# Altium PCB L-BAND_V2_0.pcbdoc
Units mil, origin at the board's own origin, x right, y up, seen from the top; angles counter-clockwise.
Board outline 805.03 x 1342.03 mil, 2 copper layers (Top Layer, Bottom Layer); 34 components, 38 nets, 153 pads, 78 vias.
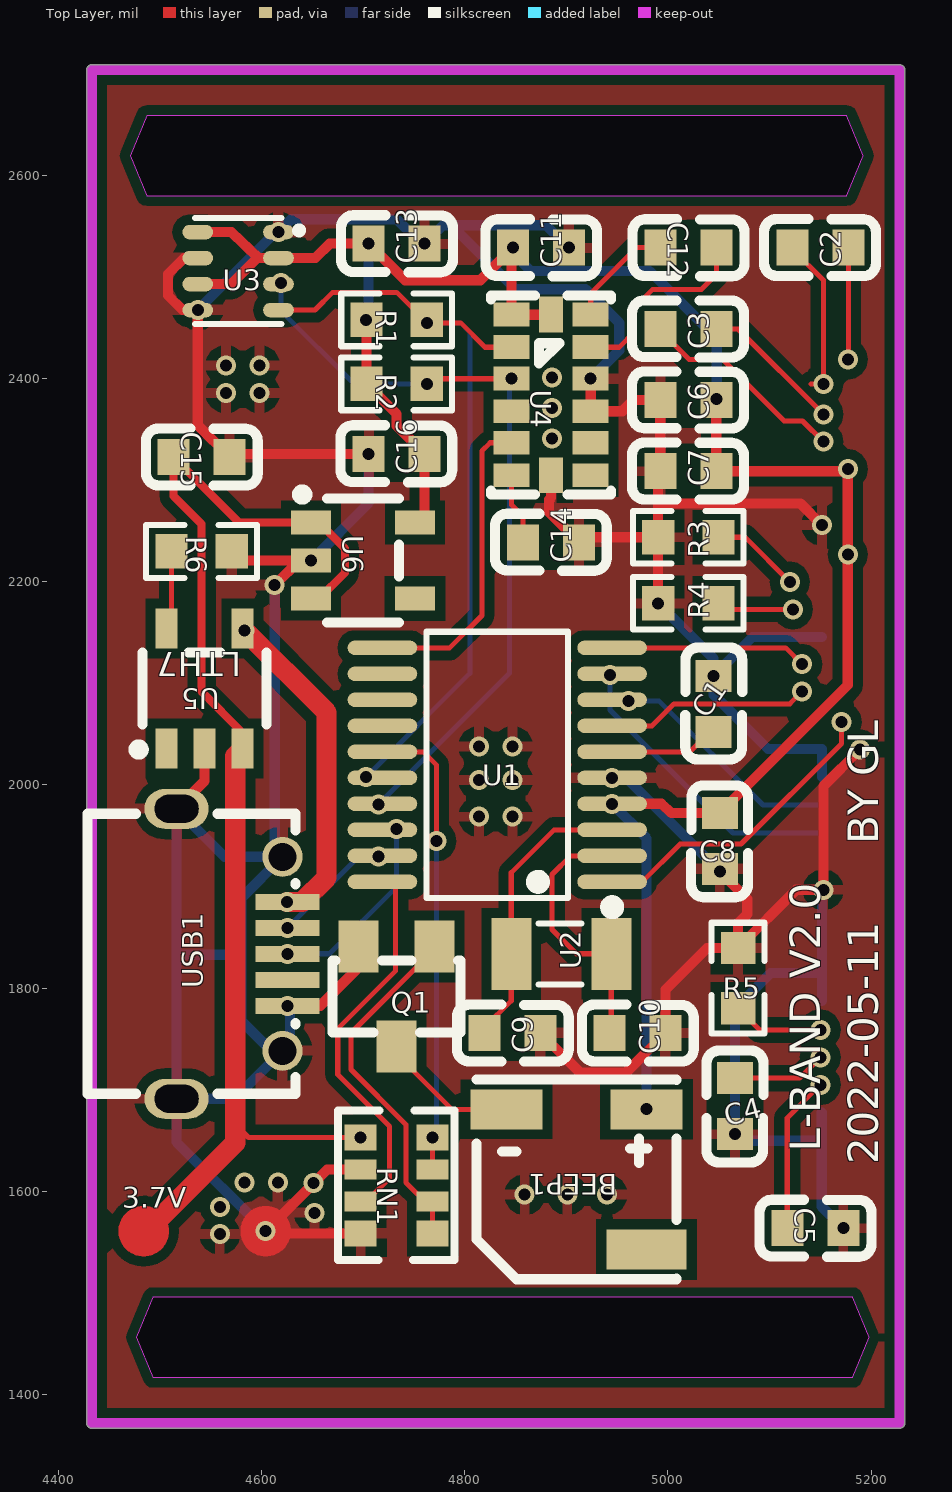
[diagram p0: Top Layer view]
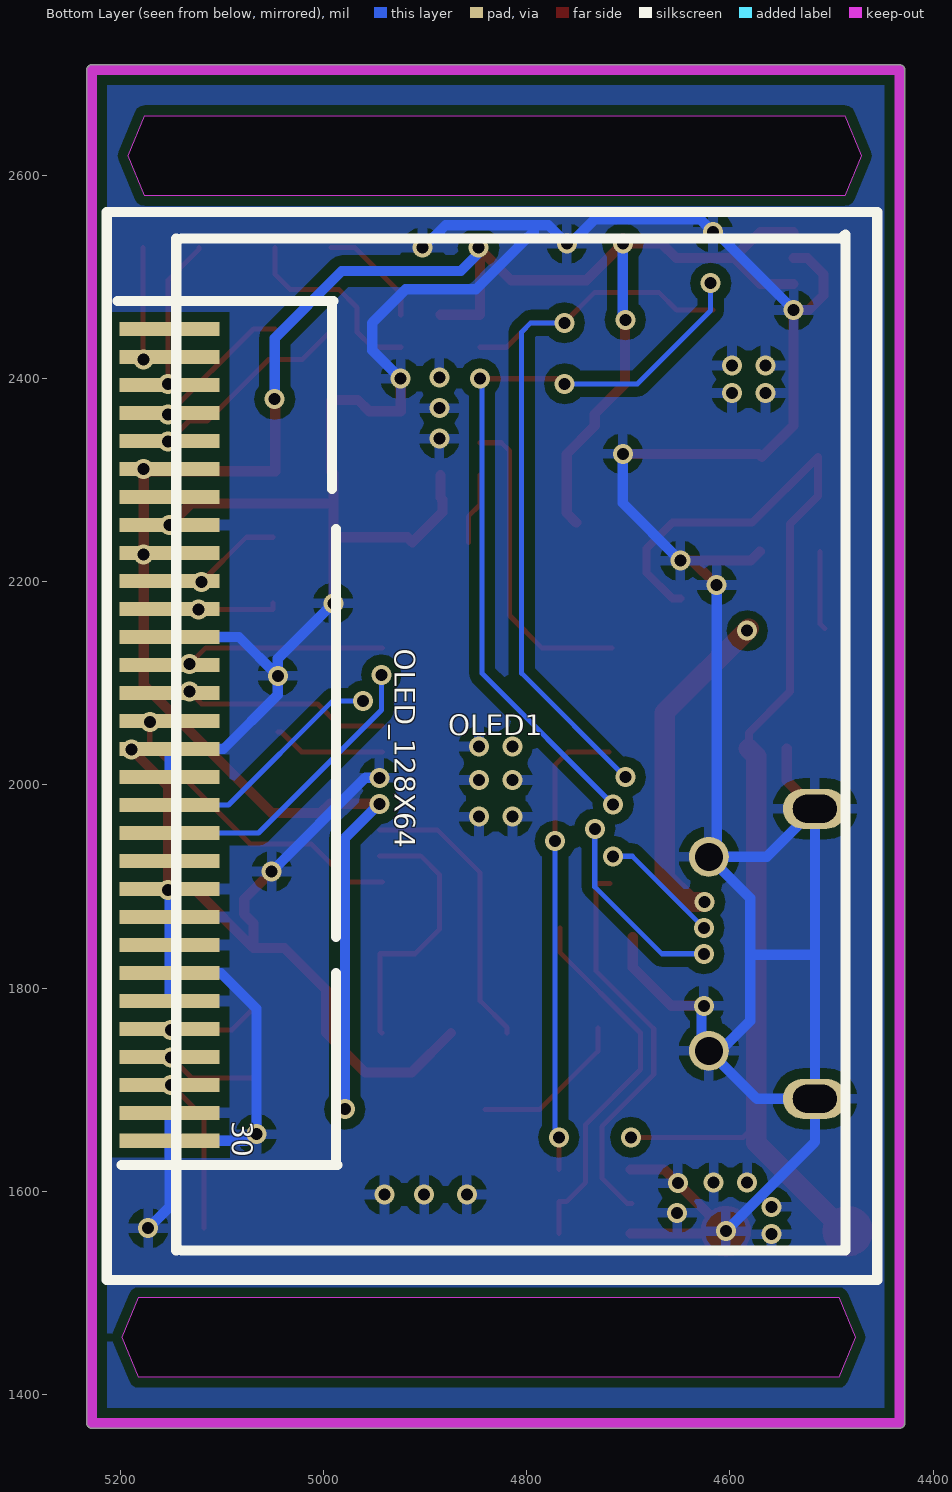
[diagram p1: Bottom Layer view, seen from below]

## Layer stack, top to bottom
Top Solder: solder mask 0.4, Solder Resist, Dk 3.5
Top Layer: signal copper 1.4
Dielectric1: dielectric 12.6, FR-4, Dk 4.8
Bottom Layer: signal copper 1.4
Bottom Solder: solder mask 0.4, Solder Resist, Dk 3.5

## Board outline
4427.95,1371.84 4427.95,1689.84 cw(c4432.97,1689.84) 4427.95,1689.94 4427.95,2697.84 ccw(c4432.97,2697.84) 4427.95,2697.74 4427.95,2697.84 4427.95,2703.84 cw(c4432.97,2703.84) 4432.97,2708.86 5227.97,2708.86 cw(c5227.97,2703.84) 5232.98,2703.84 5232.98,1371.84 cw(c5227.97,1371.84) 5227.97,1366.83 4432.97,1366.83 cw(c4432.97,1371.84)
cut-out: 4492.97,1416.84 5181.94,1416.84 5198.25,1456.21 5181.94,1495.58 4492.97,1495.58 4476.66,1456.21
cut-out: 4486.97,2580.1 5175.94,2580.1 5192.25,2619.47 5175.94,2658.84 4486.97,2658.84 4470.66,2619.47

## Design rules (kind name [scope] priority, off if disabled: settings)
Clearance [All] p1: gap=10
PolygonConnect [All] p1: connectstyle=Relief reliefconductorwidth=10 reliefentries=4 polygonreliefangle="90 Angle" airgapwidth=10
RoutingVias [All] p1: holewidth=28 width=50 viastyle="Through Hole" minholewidth=28 minwidth=50 maxholewidth=28 maxwidth=50
SolderMaskExpansion [All] p1: expansion=4
Width [All] p1: maxlimit=10 minlimit=10 preferedwidth=10
30 further rules are at their usual default settings.

## Components (designator, comment, footprint, x,y, rotation, side; value= is the part's Value field where it differs from the comment)
3.7V "3.7V 400mAH" "TEST POINT" 4603.97,1560.84 r180 top
BEEP1 "FST-5020" BUZ-SMD_FST-5020 4909.97,1611.84 r180 top
C1 "104" C0603 5044.97,2079.84 r270 top
C2 "105" C0603 5149.97,2528.84 r0 top
C3 "105" C0603 5019.97,2448.84 r0 top
C4 "4.7u" C0603 5065.97,1683.84 r90 top
C5 "2.2u" C0603 5144.97,1563.84 r180 top
C6 "105" C0603 5019.97,2378.84 r0 top
C7 "105" C0603 5019.97,2308.84 r0 top
C8 "104" C0603 5050.97,1944.84 r90 top
C9 "6pF" C0603 4846.97,1755.84 r180 top
C10 "6pF" C0603 4969.97,1755.84 r180 top
C11 "104" C0603 4874.97,2528.84 r180 top
C12 "0.22uF" C0603 5019.97,2528.84 r180 top
C13 "104" C0603 4732.97,2532.84 r180 top
C14 "4.7uF" C0603 4884.97,2238.84 r0 top
C15 "104" C0603 4540.97,2322.84 r180 top
C16 "104" C0603 4732.97,2325.84 r0 top
OLED1 "QG-2864KSWEG01" MYOLED-AA 5104.97,1943.84 r0 bottom
Q1 "j3y" J3Y 4732.97,1791.84 r90 top
R1 "4.7K" R0603 4732.97,2457.84 r0 top
R2 "4.7K" R0603 4732.97,2394.84 r0 top
R3 "1k" R0603 5019.97,2243.84 r180 top
R4 "1k" R0603 5019.97,2178.84 r180 top
R5 "910K" R0603 5068.97,1809.84 r90 top
R6 "1.5k" R0603 4540.97,2229.84 r0 top
RN1 "4.7K" RES-ARRAY-SMD_0603-8P-L3.2-W1.6-BL 4732.97,1605.84 r90 top
U1 "STM32G031F8P6" TSSOP-20_L6.5-W4.4-P0.65-LS6.4-BL 4831.97,2019.84 r90 top
U2 "32.768KHz" CRYSTAL-SMD_L3.2-W1.5-FC-135R32.7680KF-A3 4894.97,1833.84 r180 top
U3 "BMP280" SENSOR-TH_BMP280-BL 4576.97,2505.84 r180 top
U4 "LSM303DLHC" LGA-14 4884.97,2383.84 r270 top
U5 "锂电充电芯片LTC4054丝印 LTH7 贴片" ? 4543.97,2094.84 r0 top
U6 "RT9013-33GB" SOT-23-5_L3.0-W1.7-P0.95-LS2.8-BR 4699.97,2220.84 r180 top
USB1 "MICRO XNJ ZB" MICRO-USB-SMD_MICRO-XNJ-ZB 4570.97,1833.84 r90 top

## Footprints (in the part's own frame and the unit in brackets; to place one, negate y for a bottom-side part, rotate by r counter-clockwise, add the part's x,y. Pads: shape width x height; smd on the part's side, far side on the other; paste and mask are expansions set on the pad)
BUZ-SMD_FST-5020 [mm]
  rect 1.8x1 smd: 1(-1.75,-1.75) 2(1.75,-1.75)
  rect 2x1 smd: 3(-1.75,1.75)
  silkscreen extent -2.5,-2.5 2.5,2.5
C0603 [mm]
  rect 0.8x0.9 smd: 1(-0.7,0) 2(0.7,0)
  silkscreen extent -1.41,-0.71 1.39,0.72
CRYSTAL-SMD_L3.2-W1.5-FC-135R32.7680KF-A3 [mm]
  rect 1x1.8 smd: 1(-1.25,0) 2(1.25,0)
  silkscreen extent -0.51,-0.76 0.57,0.76
J3Y [mm]
  rect 1.3x1 smd: 1(1.25,-0.95) 2(1.25,0.95) 3(-1.25,0)
  silkscreen extent -0.9,-1.6 0.9,1.6
LGA-14 [mil]
  rect 23.6x35.4 smd: 1(-79,-39) 2(-47,-39) 3(-16,-39) 4(16,-39) 5(47,-39) 6(79,-39) 8(79,39) 9(47,39) 10(16,39) 11(-16,39) 12(-47,39) 13(-79,39)
  rect 35.4x23.6 smd: 7(79,0) 14(-79,0)
  silkscreen extent -98,-59 98,59
MICRO-USB-SMD_MICRO-XNJ-ZB [mm]
  rect 0.4x1.6 smd: 1(1.3,-1.388) 2(0.65,-1.388) 3(0,-1.388) 4(-0.65,-1.388) 5(-1.3,-1.388)
  oval 1x1.6 hole 0.7 slot 1.1 at 90 deg: 6(-3.625,1.388) 6(3.625,1.388)
  round 1 hole 0.7: 6(-2.425,-1.262) 6(2.425,-1.262)
  silkscreen extent -3.5,-1.59 3.5,3.62
MYOLED-AA [mil]
  rect 98.4x13.8 smd: 1(46.56,-505.13) 2(46.48,-477.37) 3(46.48,-449.81) 4(46.48,-422.25) 5(46.48,-394.69) 6(46.48,-367.13) 7(46.48,-339.57) 8(46.48,-312.02) 9(46.48,-284.46) 10(46.48,-256.9) 11(46.48,-229.34) 12(46.48,-201.78) 13(46.48,-174.22) 14(46.48,-146.66) 15(46.48,-119.1) 16(46.48,-91.54) 17(46.48,-63.98) 18(46.48,-36.43) 19(46.48,-8.87) 20(46.48,18.69) 21(46.48,46.25) 22(46.48,73.81) 23(46.48,101.37) 24(46.48,128.93) 25(46.48,156.49) 26(46.48,184.05) 27(46.48,211.61) 28(46.42,238.97) 29(46.38,266.49) 30(46.38,294.01)
  silkscreen extent -650,-620 108,431
R0603 [mil]
  rect 31.75x34.02 smd: 1(-29.65,0) 2(29.65,0)
  silkscreen extent -55,-26 55,26
RES-ARRAY-SMD_0603-8P-L3.2-W1.6-BL [mm]
  rect 0.65x0.8 smd: 1(-1.2,-0.9) 4(1.2,-0.9) 5(1.2,0.9) 8(-1.2,0.9)
  rect 0.5x0.8 smd: 2(-0.4,-0.9) 3(0.4,-0.9) 6(0.4,0.9) 7(-0.4,0.9)
  silkscreen extent -1.87,-1.45 1.87,1.47
SENSOR-TH_BMP280-BL [mm]
  oval 0.767x0.364 smd: 1(-1.008,-0.975) 2(-1.008,-0.325) 3(-1.008,0.325) 4(-1.008,0.975) 5(1.009,0.975) 6(1.009,0.325) 7(1.009,-0.325) 8(1.009,-0.975)
  silkscreen extent -1.61,-1.33 1.08,1.33
SOT-23-5_L3.0-W1.7-P0.95-LS2.8-BR [mm]
  rect 1x0.6 smd: 1(1.3,-0.95) 2(1.3,0) 3(1.3,0.95) 4(-1.3,0.95) 5(-1.3,-0.95)
  silkscreen extent -0.9,-1.78 1.65,1.55
"TEST POINT" [mil]
  round 0 smd: 1(0,0) 2(120,0)
  Top Layer region: 95.31,0 95.36,1.41 95.48,2.81 95.68,4.21 95.96,5.59 96.31,6.96 96.75,8.3 97.26,9.61 97.85,10.89 98.51,12.14 99.23,13.35 100.03,14.51 100.89,15.63 101.81,16.69 102.8,17.7 103.84,18.66 104.93,19.55 106.07,20.38 107.25,21.14 108.48,21.83 109.74,22.45 111.04,23 112.37,23.48 113.73,23.87 115.1,24.19 116.49,24.43 117.89,24.59 119.3,24.68 120.7,24.68 122.11,24.59 123.51,24.43 124.9,24.19 126.27,23.87 127.63,23.48 128.96,23 130.26,22.45 131.52,21.83 132.75,21.14 133.93,20.38 135.07,19.55 136.16,18.66 137.2,17.7 138.19,16.69 139.11,15.63 139.97,14.51 140.77,13.35 141.49,12.14 142.15,10.89 142.74,9.61 143.25,8.3 143.69,6.96 144.04,5.59 144.32,4.21 144.52,2.81 144.65,1.41 144.69,0 144.65,-1.41 144.52,-2.81 144.32,-4.21 144.04,-5.59 143.69,-6.95 143.25,-8.29 142.74,-9.61 142.15,-10.89 141.49,-12.14 140.77,-13.35 139.97,-14.51 139.11,-15.63 138.19,-16.69 137.2,-17.7 136.16,-18.66 135.07,-19.55 133.93,-20.38 132.75,-21.14 131.52,-21.83 130.26,-22.45 128.96,-23 127.63,-23.48 126.27,-23.87 124.9,-24.19 123.51,-24.43 122.11,-24.59 120.7,-24.67 119.3,-24.67 117.89,-24.59 116.49,-24.43 115.1,-24.19 113.73,-23.87 112.37,-23.48 111.04,-23 109.74,-22.45 108.48,-21.83 107.25,-21.14 106.07,-20.38 104.93,-19.55 103.84,-18.66 102.8,-17.7 101.81,-16.69 100.89,-15.63 100.03,-14.51 99.23,-13.35 98.51,-12.14 97.85,-10.89 97.26,-9.61 96.75,-8.29 96.31,-6.95 95.96,-5.59 95.68,-4.21 95.48,-2.81 95.36,-1.41
  Top Layer region: -24.69,0 -24.64,1.41 -24.52,2.81 -24.32,4.21 -24.04,5.59 -23.69,6.96 -23.25,8.3 -22.74,9.61 -22.15,10.89 -21.49,12.14 -20.77,13.35 -19.97,14.51 -19.11,15.63 -18.19,16.69 -17.2,17.7 -16.16,18.66 -15.07,19.55 -13.93,20.38 -12.75,21.14 -11.52,21.83 -10.26,22.45 -8.96,23 -7.63,23.48 -6.27,23.87 -4.9,24.19 -3.51,24.43 -2.11,24.59 -0.7,24.68 0.7,24.68 2.11,24.59 3.51,24.43 4.9,24.19 6.27,23.87 7.63,23.48 8.96,23 10.26,22.45 11.52,21.83 12.75,21.14 13.93,20.38 15.07,19.55 16.16,18.66 17.2,17.7 18.19,16.69 19.11,15.63 19.97,14.51 20.77,13.35 21.49,12.14 22.15,10.89 22.74,9.61 23.25,8.3 23.69,6.96 24.04,5.59 24.32,4.21 24.52,2.81 24.65,1.41 24.69,0 24.65,-1.41 24.52,-2.81 24.32,-4.21 24.04,-5.59 23.69,-6.95 23.25,-8.29 22.74,-9.61 22.15,-10.89 21.49,-12.14 20.77,-13.35 19.97,-14.51 19.11,-15.63 18.19,-16.69 17.2,-17.7 16.16,-18.66 15.07,-19.55 13.93,-20.38 12.75,-21.14 11.52,-21.83 10.26,-22.45 8.96,-23 7.63,-23.48 6.27,-23.87 4.9,-24.19 3.51,-24.43 2.11,-24.59 0.7,-24.67 -0.7,-24.67 -2.11,-24.59 -3.51,-24.43 -4.9,-24.19 -6.27,-23.87 -7.63,-23.48 -8.96,-23 -10.26,-22.45 -11.52,-21.83 -12.75,-21.14 -13.93,-20.38 -15.07,-19.55 -16.16,-18.66 -17.2,-17.7 -18.19,-16.69 -19.11,-15.63 -19.97,-14.51 -20.77,-13.35 -21.49,-12.14 -22.15,-10.89 -22.74,-9.61 -23.25,-8.29 -23.69,-6.95 -24.04,-5.59 -24.32,-4.21 -24.52,-2.81 -24.64,-1.41
TSSOP-20_L6.5-W4.4-P0.65-LS6.4-BL [mm]
  oval 0.364x1.742 smd: 1(-2.925,-2.871) 2(-2.275,-2.871) 3(-1.625,-2.871) 4(-0.975,-2.871) 5(-0.325,-2.871) 6(0.325,-2.871) 7(0.975,-2.871) 8(1.625,-2.871) 9(2.275,-2.871) 10(2.925,-2.871) 11(2.925,2.871) 12(2.275,2.871) 13(1.625,2.871) 14(0.975,2.871) 15(0.325,2.871) 16(-0.325,2.871) 17(-0.975,2.871) 18(-1.625,2.871) 19(-2.275,2.871) 20(-2.925,2.871)
  silkscreen extent -3.71,-3.02 3.33,1.77
? [mm]
  rect 0.55x1 smd: 1(-0.95,-1.5) 2(0,-1.5) 3(0.95,-1.5) 4(0.95,1.5) 5(-0.95,1.5)
  silkscreen extent -1.78,-1.65 1.55,0.9

## Via types
v1: diameter 19.69, hole 11.81, Top Layer to Bottom Layer, 78 vias

## Nets (pads, with @x,y where several pads share a name; then routed paths per layer and width w, separated by ;. In a path a pad name is that pad's centre, name@x,y a point inside that pad or via, vN(x,y) a via of type N, cw(c..) or ccw(c..) an arc to the next point about the centre after c; other vN are vias at no path point)
+3.3V: BEEP1.1 C6.2 C7.2 C8.2 C11.2 C13.2 C16.2 OLED1.6 OLED1.9 R1.1 R2.1 U1.4 U3.2 U3.6 U3.8 U4.1 U4.14 U6.5 | length 2169
  Top Layer w10: U3.6 4570.17,2493.04 4595.76,2518.63 U3.2 ; U3.8 4570.37,2544.24 4597.17,2518.64 U3.2 ; v1(4702.97,2457.84) 4703.31,2457.5 R2.1 4732.97,2365.18 4732.97,2353.41 C16.2 4760.53,2267.62 U6.5 ; v1(4705.41,2532.84) 4741.37,2496.84 4815.37,2496.84 v1(4847.41,2528.84) ; v1(4705.41,2532.84) 4666.97,2532.84 4652.76,2518.63 U3.2 ; v1(4847.41,2528.84) 4845.97,2527.4 U4.1 U4.14 ; v1(4944.97,1981.44) 4993.37,1981.44 5003.57,1972.44 C8.2 5176.97,2098.44 v1(5176.97,2226.84) v1(5176.97,2310.84) 5174.97,2308.84 C7.2 C6.2
  Bottom Layer w10: v1(4702.97,2457.84) 4705.41,2460.28 4705.41,2517.28 v1(4705.41,2532.84) ; v1(4847.41,2528.84) 4847.41,2523.4 4864.97,2505.84 4981.97,2505.84 5047.97,2439.84 v1(5047.97,2379.84) ; v1(4944.97,1981.44) 4978.97,1947.44 v1(4978.97,1680.84)
+5V: U5.4 USB1.1 | length 328.3
  Top Layer w20: U5.4 4663.97,2071.34 4663.97,1908.84 4639.97,1884.84 v1(4624.97,1884.84)
  other v1: 4582.97,2151.84
ADC_IN: RN1.3 RN1.4 U1.15 | length 458.1
  Top Layer w5: U1.15 4759.17,2032.64 4771.97,2019.84 v1(4771.97,1944.84) ; RN1.3 v1(4768.4,1653.08)
  Bottom Layer w5: v1@4768.37,1653.04 4771.97,1656.64 v1(4771.97,1944.84)
BEEP: RN1.7 U1.20 | length 388.2
  Top Layer w5: RN1.7@4696.57,1588.24 4701.17,1588.24 4725.97,1613.04 4725.97,1664.04 4674.97,1715.04 4674.97,1760.04 4731.97,1817.04 4731.97,1902.84 U1.20@4717.97,1902.84
BEEP1_2: BEEP1.2 Q1.3 | length 157.6
  Top Layer w5: Q1.3@4729.97,1760.64 4729.97,1737.84 4787.07,1680.74 BEEP1.2
CS: OLED1.13 U1.10 | length 196.7
  Top Layer w5: U1.10@4942,2135 5115.81,2135 v1(5131.97,2118.84)
D0: OLED1.18 U1.8 | length 233
  Bottom Layer w5: v1(4960.97,2082.84) 4990.97,2082.84 5093.54,1980.27 OLED1.18
D1: OLED1.19 U1.9 | length 293.3
  Bottom Layer w5: v1(4943,2108.41) 4942.97,2073.84 5064.07,1952.74 OLED1.19@5151.47,1952.74
DC: OLED1.15 U1.1 | length 306.4
  Top Layer w5: U1.1@4942,1904.68 4974.81,1904.68 5011.97,1941.84 5071.97,1941.84 5170.97,2040.84 v1(5170.97,2061.84)
GND: 3.7V.1 C1.1 C4.1 C5.1 C6.1 C7.1 C8.1 C9.1 C10.1 C11.1 C13.1 C14.2 C15.1 C16.1 OLED1.8 OLED1.12 OLED1.16 OLED1.17 OLED1.21 OLED1.22 OLED1.23 OLED1.24 OLED1.25 OLED1.29 OLED1.30 Q1.2 R3.2 R4.2 R5.2 R6.2 RN1.6 RN1.8 U1.5 U3.1 U3.5 U3.7 U4.7 U4.10 U4.11 U5.2 U6.2 USB1.5 USB1.6 | length 5410.3
  Top Layer w10: USB1.6@4516.34,1976.56 4543.97,2004.19 U5.2 ; U3.7 4523.77,2518.64 4507.97,2502.84 4507.97,2481.84 4522.37,2467.44 v1(4537.27,2467.44) 4537.26,2354.11 C15.1 4571.53,2325.84 v1(4705.41,2325.84) ; R6.2 4579.63,2220.84 v1(4648.77,2220.84) ; v1(4612.97,2196.84) 4636.97,2220.84 v1(4648.77,2220.84) ; USB1.6@4615.97,1934.04 USB1.6@4620.67,1929.34 ; v1(4625.57,1782.64) 4657.77,1782.64 4695.57,1820.44 Q1.2@4695.57,1850.04 ; RN1.8 4606.21,1558.6 v1(4603.97,1560.84) v1(4651.23,1608.09) 4664.72,1621.59 RN1.6 ; C9.1@4874.57,1755.84 4913.57,1716.84 4958.57,1716.84 4997.57,1755.84 4997.57,1798.44 5038.67,1839.54 R5.2 ; U4.7 4884.97,2282.84 4882.97,2280.84 4882.97,2268.4 C14.2 4917.53,2243.84 R3.2 ; v1(4923.97,2399.84) U4.10 4954.97,2367.84 4965.97,2378.84 C6.1 C7.1 4990.31,2306.74 R3.2 ; v1(4990.31,2178.84) R3.2 ; 4990.31,2277.16 5130.16,2277.16 v1(5151.45,2255.86) ; v1(5050.97,1914.84) 5077.97,1887.85 5077.97,1872.84 5068.97,1863.84 R5.2 5126.31,1896.84 v1(5152.97,1896.84) 5152.97,1998.85 v1(5188.97,2034.84)
  Bottom Layer w10: 4516.34,1832.94 4578.54,1832.94 4579.97,1831.51 ; v1(4537.27,2467.44) 4614.06,2544.23 v1(4616.67,2544.23) 4629.28,2556.84 4732.97,2556.84 4756.97,2532.84 v1(4760.53,2532.84) 4778.57,2550.84 4879.97,2550.84 v1@4902.57,2528.84 ; v1(4603.97,1560.84) 4516.34,1648.47 USB1.6@4516.34,1691.12 ; v1(4612.97,2196.84) 4612.97,1934.04 USB1.6@4620.67,1929.31 ; v1@4627.97,1779.84 4627.97,1745.67 USB1.6@4620.67,1738.37 ; v1(4648.77,2220.84) 4705.41,2277.48 v1(4705.41,2325.84) ; 4792.82,2550.84 4792.82,2544.99 4849.97,2487.84 4918.97,2487.84 4951.97,2454.84 4951.97,2427.84 v1(4923.97,2399.84) ; v1(4945,2007.05) 4958.76,2007.05 v1(5050.97,1914.84) ; v1(4990.31,2178.84) 5044.97,2124.18 v1(5044.97,2107.4) ; OLED1.29 OLED1.30 ; OLED1.25 OLED1.21 ; OLED1.24 5101.04,1814.91 5065.97,1779.84 v1(5065.97,1656.28) 5072.42,1649.83 OLED1.30 ; OLED1.17 OLED1.16 5098.43,2035.38 5044.97,2088.84 v1(5044.97,2107.4) ; OLED1.12 5083.19,2145.62 v1(5044.97,2107.4) ; v1(5172.53,1563.84) 5151.35,1585.02 OLED1.30 ; USB1.6@4516.34,1691.12 4516.34,1976.56 4563.59,1929.31 USB1.6@4620.67,1929.31 ; USB1.6@4516.34,1691.12 4573.42,1691.12 USB1.6@4620.67,1738.37 ; USB1.6@4620.67,1738.37 4609.44,1738.37 4579.97,1767.84 4579.97,1888.61 USB1.6@4620.67,1929.31
  other v1: 4558.97,1557.84 4651.97,1578.84 4558.97,1584.84 4858.97,1596.84 4900.97,1596.84 4939.97,1596.84 4582.97,1608.84 4615.97,1608.84 4813.97,1968.84 4846.97,1968.84 4813.97,2004.84 4846.97,2004.84 4813.97,2037.84 4846.97,2037.84 4885.97,2340.84 4885.97,2370.84 4564.97,2385.84 4597.97,2385.84 4885.97,2400.84 4564.97,2412.84 4597.97,2412.84 4902.53,2528.84
INT: U1.11 U4.5 | length 308.5
  Top Layer w5: U1.11@4715.94,2135 4785.13,2135 4816.97,2166.84 4816.97,2328.84 4824.97,2336.84 U4.5
NC: U4.8
NRST: C1.2 U1.6 | length 111.1
  Top Layer w5: U1.6@4942,2032.64 5021.67,2032.64 5041.27,2052.24 C1.2@5044.97,2052.24
NULL: 
OLED1_2: C2.2 OLED1.2 | length 110.2
  Top Layer w5: v1(5176.97,2418.84) 5177.53,2419.4 C2.2
OLED1_3: C2.1 OLED1.3 | length 158.7
  Top Layer w5: C2.1 5122.41,2527.4 5152.97,2496.84 v1(5152.97,2394.84) 5140.97,2394.84
OLED1_4: C3.2 OLED1.4 | length 140.2
  Top Layer w5: C3.2 5068.97,2448.84 v1(5152.97,2364.84)
OLED1_5: C3.1 OLED1.5 | length 207.4
  Top Layer w5: C3.1 4992.41,2447.4 5020.97,2418.84 5053.97,2418.84 5114.46,2358.35 5132.46,2358.35 v1(5152.97,2337.84)
OLED1_10: OLED1.10 R3.1 | length 88.6
  Top Layer w5: R3.1 5075.97,2243.84 v1(5119.97,2199.84)
OLED1_11: OLED1.11 R4.1 | length 79.3
  Top Layer w5: R4.1@5049.67,2178.84 5049.67,2172.84 v1(5122.97,2172.84)
OLED1_26: OLED1.26 R5.1 | length 89.8
  Top Layer w5: R5.1 5090.31,1758.84 v1(5149.97,1758.84)
OLED1_27: C4.2 OLED1.27 | length 92.5
  Top Layer w5: C4.2 5129.53,1711.4 v1(5149.97,1731.84)
OLED1_28: C5.2 OLED1.28 | length 154.5
  Top Layer w5: C5.2 5117.41,1672.28 v1(5149.97,1704.84)
Q1_1: Q1.1 RN1.1 RN1.2 | length 371.2
  Top Layer w5: Q1.1@4767.37,1859.04 4767.37,1835.24 4687.97,1755.84 4687.97,1719.84 4741.97,1665.84 4741.97,1608.84 4760.67,1590.04 RN1.2@4768.37,1590.04 ; RN1.1 RN1.2
RES: OLED1.14 U1.7 | length 203.9
  Top Layer w5: U1.7@4942,2058.23 4984.36,2058.23 5005.97,2079.84 5119.97,2079.84 v1(5131.97,2091.84)
S$30103: 
S$30107: 
SCL: R1.2 U1.16 U3.4 U4.2 | length 787.1
  Top Layer w5: U3.4@4616.67,2467.44 4652.57,2467.44 4669.97,2484.84 4732.97,2484.84 4762.67,2455.14 R1.2@4762.67,2457.84 ; v1(4762.97,2454.84) 4795.97,2454.84 4819.97,2430.84 U4.2
  Bottom Layer w5: v1(4702.97,2007.84) 4804.97,2109.84 4804.97,2445.84 4795.97,2454.84 v1(4762.97,2454.84)
SDA: R2.2 U1.17 U3.3 U4.3 | length 762.7
  Top Layer w5: v1(4762.63,2394.84) 4767.63,2399.84 v1(4845.97,2399.84)
  Bottom Layer w5: v1(4618.97,2493.84) 4618.97,2466.84 4690.97,2394.84 v1@4765.97,2394.84 ; v1(4714.97,1980.84) 4843.97,2109.84 v1@4843.97,2400.84
SWCLK: U1.19 USB1.2 | length 118.5
  Bottom Layer w5: v1(4625.6,1859.43) 4696.01,1929.84 v1(4714.97,1929.84)
SWDIO: U1.18 USB1.3 | length 191.7
  Bottom Layer w5: v1(4625.6,1833.84) 4666.97,1833.84 4732.97,1899.84 v1(4732.97,1956.84)
U1_2: C10.2 U1.2 U2.1 | length 277.7
  Top Layer w5: U2.1@4933.97,1833.84 U2.1 4944.18,1757.61 C10.2 ; U2.1 4909.97,1833.84 4885.97,1857.84 4885.97,1911.84 4904.37,1930.24 U1.2@4944.97,1930.24
U1_3: C9.2 U1.3 U2.2 | length 285.4
  Top Layer w5: C9.2 4819.41,1761.28 4845.76,1787.63 U2.2 4845.76,1913.63 4887.99,1955.86 U1.3
U4_6: C14.1 U4.6 | length 70.7
  Top Layer w5: U4.6 4845.97,2275.84 4857.41,2264.4 C14.1
U4_12: C12.1 U4.12 | length 193.7
  Top Layer w5: U4.12 4951.97,2430.84 4966.97,2445.84 4966.97,2469.84 4984.97,2487.84 5032.97,2487.84 5047.57,2502.44 C12.1@5047.57,2528.84
U4_13: C12.2 U4.13 | length 108
  Top Layer w5: U4.13 4923.97,2483.84 4968.97,2528.84 C12.2
U5_5: R6.1 U5.5 | length 77.9
  Top Layer w5: U5.5 4511.31,2158.64 R6.1
VBAT: 3.7V.2 C15.2 RN1.5 U5.3 U6.1 U6.3 | length 1234.9
  Top Layer w5: 4573.97,1666.22 4587.11,1653.08 v1(4697.54,1653.08)
  Top Layer w8: C15.2 4577.97,2258.24 U6.1 4656.57,2258.24 4681.97,2232.84 4681.97,2208.84 4656.57,2183.44 U6.3 ; C15.2 4513.41,2284.4 4540.97,2256.84 4540.97,2091.84 4581.37,2051.44 U5.3
  Top Layer w20: 3.7V.2 4486.97,1560.84 4573.97,1647.84 4573.97,2028.44 U5.3
pads on no net: BEEP1.3 OLED1.1 OLED1.7 OLED1.20 U1.12 U1.13 U1.14 U4.4 U4.9 U5.1 U6.4 USB1.4

## Polygon pours and split planes (outlines as drawn)
GND on Top Layer "Top Layer-No Net" (solid, remove dead copper, pour order 0): 4300,2830 4305,2825 4305,1280 4310,1285 5365,1285 5365,2845 5375,2855
GND on Bottom Layer "Top Layer-No Net" (solid, remove dead copper, pour order 2): 4175,2885 4175,1250 4180,1245 5785,1245 5795,1235 5725,1305 5725,2925

## Silkscreen, mask and mechanical layers (free items; w line width, h text height)
Top Overlay:
  text "BY GL" at 5206.97,1941.84 h30 r90
  text "L-BAND V2.0" at 5149.97,1638.84 h30 r90
  text "2022-05-11" at 5206.97,1626.84 h30 r90
Document:
  lines w10: 4486.97,2580.1 cw(c4526.34,2619.47) 4486.97,2658.84 5175.95,2658.84 cw(c5136.57,2619.47) 5175.94,2580.1 4486.97,2580.1 ; 4492.97,1416.84 cw(c4532.34,1456.21) 4492.97,1495.58 5181.95,1495.58 cw(c5142.57,1456.21) 5181.94,1416.84 4492.97,1416.84

## Text inside footprints (layer, text, board x,y; h text height)
OLED1: Bottom Overlay "30" at 5089.97,1668.84 h20 r90; Bottom Overlay "OLED_128X64" at 4929.97,2133.84 h20 r90
U5: Top Overlay "LTH7" at 4579.97,2130.65 h23.62 r180